# Altium PCB Route_Guide_and_Tuning.PcbDoc (part 2 of 8)
Units mil, origin at the board's own origin, x right, y up, seen from the top; angles counter-clockwise.
Board outline 3600 x 2300 mil, 14 copper layers (L1 TOP, L2_G, L3 SIG, L4_G, L4 SIG, L6_P, L7_G, L10_P, L11_P, L7 SIG, L13_P, L8 SIG, L15_G, L10 BOT), stack 89.291 mil thick; 4 components, 1934 nets, 2174 pads, 2165 vias.
Unrouted connection lines stored in the file: 123.
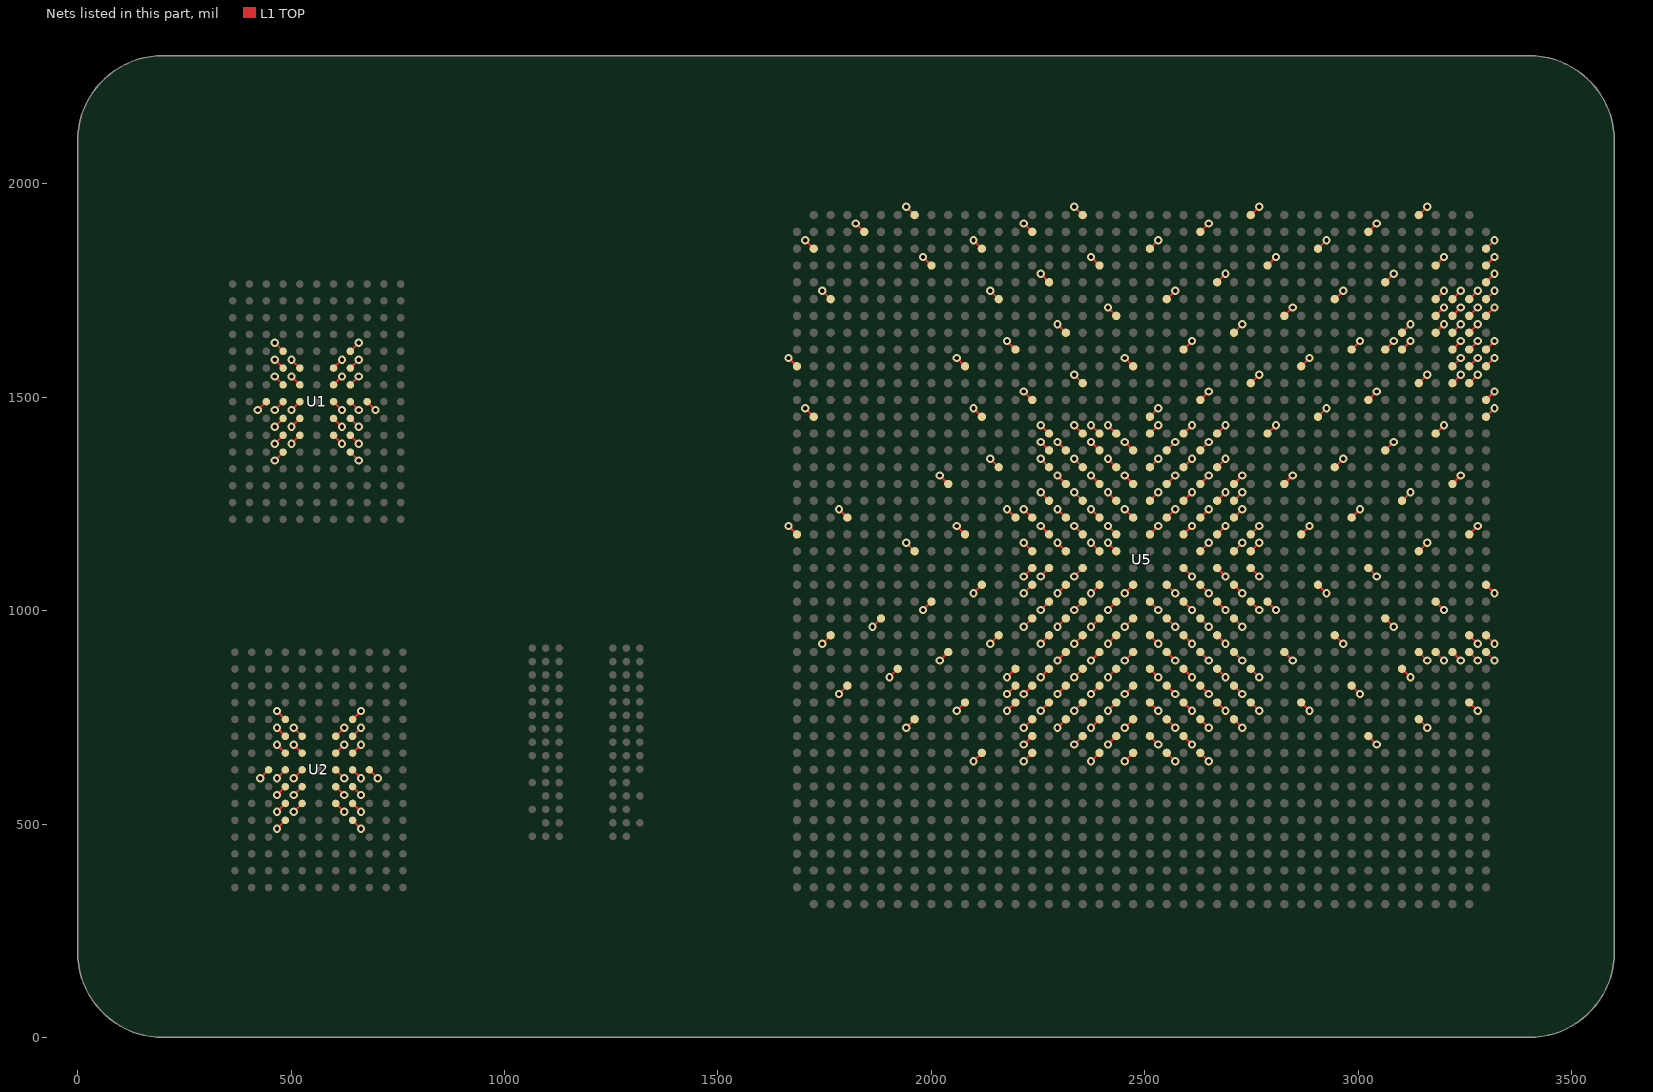
[diagram p14: the nets of this part, all layers, seen from the top]

## Footprints (in the part's own frame and the unit in brackets; to place one, negate y for a bottom-side part, rotate by r counter-clockwise, add the part's x,y. Pads: shape width x height; smd on the part's side, far side on the other; paste and mask are expansions set on the pad) (continued)
FFG1759 [mm] "BGA, 1760-Leads, Body 42.5x42.5mm, Pitch 1mm"
  round 0.5 smd: A2(-19.5,20.5) A3(-18.5,20.5) A4(-17.5,20.5) A5(-16.5,20.5) A6(-15.5,20.5) A7(-14.5,20.5) A8(-13.5,20.5) A9(-12.5,20.5) A10(-11.5,20.5) A11(-10.5,20.5) A12(-9.5,20.5) A13(-8.5,20.5) A14(-7.5,20.5) A15(-6.5,20.5) A16(-5.5,20.5) A17(-4.5,20.5) A18(-3.5,20.5) A19(-2.5,20.5) A20(-1.5,20.5) A21(-0.5,20.5) A22(0.5,20.5) A23(1.5,20.5) A24(2.5,20.5) A25(3.5,20.5) A26(4.5,20.5) A27(5.5,20.5) A28(6.5,20.5) A29(7.5,20.5) A30(8.5,20.5) A31(9.5,20.5) A32(10.5,20.5) A33(11.5,20.5) A34(12.5,20.5) A35(13.5,20.5) A36(14.5,20.5) A37(15.5,20.5) A38(16.5,20.5) A39(17.5,20.5) A40(18.5,20.5) A41(19.5,20.5) AA1(-20.5,0.5) AA2(-19.5,0.5) AA3(-18.5,0.5) AA4(-17.5,0.5) AA5(-16.5,0.5) AA6(-15.5,0.5) AA7(-14.5,0.5) AA8(-13.5,0.5) AA9(-12.5,0.5) AA10(-11.5,0.5) AA11(-10.5,0.5) AA12(-9.5,0.5) AA13(-8.5,0.5) AA14(-7.5,0.5) AA15(-6.5,0.5) AA16(-5.5,0.5) AA17(-4.5,0.5) AA18(-3.5,0.5) AA19(-2.5,0.5) AA20(-1.5,0.5) AA21(-0.5,0.5) AA22(0.5,0.5) AA23(1.5,0.5) AA24(2.5,0.5) AA25(3.5,0.5) AA26(4.5,0.5) AA27(5.5,0.5) AA28(6.5,0.5) AA29(7.5,0.5) AA30(8.5,0.5) AA31(9.5,0.5) AA32(10.5,0.5) AA33(11.5,0.5) AA34(12.5,0.5) AA35(13.5,0.5) AA36(14.5,0.5) AA37(15.5,0.5) AA38(16.5,0.5) AA39(17.5,0.5) AA40(18.5,0.5) AA41(19.5,0.5) AA42(20.5,0.5) AB1(-20.5,-0.5) AB2(-19.5,-0.5) AB3(-18.5,-0.5) AB4(-17.5,-0.5) AB5(-16.5,-0.5) AB6(-15.5,-0.5) AB7(-14.5,-0.5) AB8(-13.5,-0.5) AB9(-12.5,-0.5) AB10(-11.5,-0.5) AB11(-10.5,-0.5) AB12(-9.5,-0.5) AB13(-8.5,-0.5) AB14(-7.5,-0.5) AB15(-6.5,-0.5) AB16(-5.5,-0.5) AB17(-4.5,-0.5) AB18(-3.5,-0.5) AB19(-2.5,-0.5) AB20(-1.5,-0.5) AB21(-0.5,-0.5) AB22(0.5,-0.5) AB23(1.5,-0.5) AB24(2.5,-0.5) AB25(3.5,-0.5) AB26(4.5,-0.5) AB27(5.5,-0.5) AB28(6.5,-0.5) AB29(7.5,-0.5) AB30(8.5,-0.5) AB31(9.5,-0.5) AB32(10.5,-0.5) AB33(11.5,-0.5) AB34(12.5,-0.5) AB35(13.5,-0.5) AB36(14.5,-0.5) AB37(15.5,-0.5) AB38(16.5,-0.5) AB39(17.5,-0.5) AB40(18.5,-0.5) AB41(19.5,-0.5) AB42(20.5,-0.5) AC1(-20.5,-1.5) AC2(-19.5,-1.5) AC3(-18.5,-1.5) AC4(-17.5,-1.5) AC5(-16.5,-1.5) AC6(-15.5,-1.5) AC7(-14.5,-1.5) AC8(-13.5,-1.5) AC9(-12.5,-1.5) AC10(-11.5,-1.5) AC11(-10.5,-1.5) AC12(-9.5,-1.5) AC13(-8.5,-1.5) AC14(-7.5,-1.5) AC15(-6.5,-1.5) AC16(-5.5,-1.5) AC17(-4.5,-1.5) AC18(-3.5,-1.5) AC19(-2.5,-1.5) AC20(-1.5,-1.5) AC21(-0.5,-1.5) AC22(0.5,-1.5) AC23(1.5,-1.5) AC24(2.5,-1.5) AC25(3.5,-1.5) AC26(4.5,-1.5) AC27(5.5,-1.5) AC28(6.5,-1.5) AC29(7.5,-1.5) AC30(8.5,-1.5) AC31(9.5,-1.5) AC32(10.5,-1.5) AC33(11.5,-1.5) AC34(12.5,-1.5) AC35(13.5,-1.5) AC36(14.5,-1.5) AC37(15.5,-1.5) AC38(16.5,-1.5) AC39(17.5,-1.5) AC40(18.5,-1.5) AC41(19.5,-1.5) AC42(20.5,-1.5) AD1(-20.5,-2.5) AD2(-19.5,-2.5) AD3(-18.5,-2.5) AD4(-17.5,-2.5) AD5(-16.5,-2.5) AD6(-15.5,-2.5) AD7(-14.5,-2.5) AD8(-13.5,-2.5) AD9(-12.5,-2.5) AD10(-11.5,-2.5) AD11(-10.5,-2.5) AD12(-9.5,-2.5) AD13(-8.5,-2.5) AD14(-7.5,-2.5) AD15(-6.5,-2.5) AD16(-5.5,-2.5) AD17(-4.5,-2.5) AD18(-3.5,-2.5) AD19(-2.5,-2.5) AD20(-1.5,-2.5) AD21(-0.5,-2.5) AD22(0.5,-2.5) AD23(1.5,-2.5) AD24(2.5,-2.5) AD25(3.5,-2.5) AD26(4.5,-2.5) AD27(5.5,-2.5) AD28(6.5,-2.5) AD29(7.5,-2.5) AD30(8.5,-2.5) AD31(9.5,-2.5) AD32(10.5,-2.5) AD33(11.5,-2.5) AD34(12.5,-2.5) AD35(13.5,-2.5) AD36(14.5,-2.5) AD37(15.5,-2.5) AD38(16.5,-2.5) AD39(17.5,-2.5) AD40(18.5,-2.5) AD41(19.5,-2.5) AD42(20.5,-2.5) AE1(-20.5,-3.5) AE2(-19.5,-3.5) AE3(-18.5,-3.5) AE4(-17.5,-3.5) AE5(-16.5,-3.5) AE6(-15.5,-3.5) AE7(-14.5,-3.5) AE8(-13.5,-3.5) AE9(-12.5,-3.5) AE10(-11.5,-3.5) AE11(-10.5,-3.5) AE12(-9.5,-3.5) AE13(-8.5,-3.5) AE14(-7.5,-3.5) AE15(-6.5,-3.5) AE16(-5.5,-3.5) AE17(-4.5,-3.5) AE18(-3.5,-3.5) AE19(-2.5,-3.5) AE20(-1.5,-3.5) AE21(-0.5,-3.5) AE22(0.5,-3.5) AE23(1.5,-3.5) AE24(2.5,-3.5) AE25(3.5,-3.5) AE26(4.5,-3.5) AE27(5.5,-3.5) AE28(6.5,-3.5) AE29(7.5,-3.5) AE30(8.5,-3.5) AE31(9.5,-3.5) AE32(10.5,-3.5) AE33(11.5,-3.5) AE34(12.5,-3.5) AE35(13.5,-3.5) AE36(14.5,-3.5) AE37(15.5,-3.5) AE38(16.5,-3.5) AE39(17.5,-3.5) AE40(18.5,-3.5) AE41(19.5,-3.5) AE42(20.5,-3.5) AF1(-20.5,-4.5) AF2(-19.5,-4.5) AF3(-18.5,-4.5) AF4(-17.5,-4.5) AF5(-16.5,-4.5) AF6(-15.5,-4.5) AF7(-14.5,-4.5) AF8(-13.5,-4.5) AF9(-12.5,-4.5) AF10(-11.5,-4.5) AF11(-10.5,-4.5) AF12(-9.5,-4.5) AF13(-8.5,-4.5) AF14(-7.5,-4.5) AF15(-6.5,-4.5) AF16(-5.5,-4.5) AF17(-4.5,-4.5) AF18(-3.5,-4.5) AF19(-2.5,-4.5) AF20(-1.5,-4.5) AF21(-0.5,-4.5) AF22(0.5,-4.5) AF23(1.5,-4.5) AF24(2.5,-4.5) AF25(3.5,-4.5) AF26(4.5,-4.5) AF27(5.5,-4.5) AF28(6.5,-4.5) AF29(7.5,-4.5) AF30(8.5,-4.5) AF31(9.5,-4.5) AF32(10.5,-4.5) AF33(11.5,-4.5) AF34(12.5,-4.5) AF35(13.5,-4.5) AF36(14.5,-4.5) AF37(15.5,-4.5) AF38(16.5,-4.5) AF39(17.5,-4.5) AF40(18.5,-4.5) AF41(19.5,-4.5) AF42(20.5,-4.5) AG1(-20.5,-5.5) AG2(-19.5,-5.5) AG3(-18.5,-5.5) AG4(-17.5,-5.5) AG5(-16.5,-5.5) AG6(-15.5,-5.5) AG7(-14.5,-5.5) AG8(-13.5,-5.5) AG9(-12.5,-5.5) AG10(-11.5,-5.5) AG11(-10.5,-5.5) AG12(-9.5,-5.5) AG13(-8.5,-5.5) AG14(-7.5,-5.5) AG15(-6.5,-5.5) AG16(-5.5,-5.5) AG17(-4.5,-5.5) AG18(-3.5,-5.5) AG19(-2.5,-5.5) AG20(-1.5,-5.5) AG21(-0.5,-5.5) AG22(0.5,-5.5) AG23(1.5,-5.5) AG24(2.5,-5.5) AG25(3.5,-5.5) AG26(4.5,-5.5) AG27(5.5,-5.5) AG28(6.5,-5.5) AG29(7.5,-5.5) AG30(8.5,-5.5) AG31(9.5,-5.5) AG32(10.5,-5.5) AG33(11.5,-5.5) AG34(12.5,-5.5) AG35(13.5,-5.5) AG36(14.5,-5.5) AG37(15.5,-5.5) AG38(16.5,-5.5) AG39(17.5,-5.5) AG40(18.5,-5.5) AG41(19.5,-5.5) AG42(20.5,-5.5) AH1(-20.5,-6.5) AH2(-19.5,-6.5) AH3(-18.5,-6.5) AH4(-17.5,-6.5) AH5(-16.5,-6.5) AH6(-15.5,-6.5) AH7(-14.5,-6.5) AH8(-13.5,-6.5) AH9(-12.5,-6.5) AH10(-11.5,-6.5) AH11(-10.5,-6.5) AH12(-9.5,-6.5) AH13(-8.5,-6.5) AH14(-7.5,-6.5) AH15(-6.5,-6.5) AH16(-5.5,-6.5) AH17(-4.5,-6.5) AH18(-3.5,-6.5) AH19(-2.5,-6.5) AH20(-1.5,-6.5) AH21(-0.5,-6.5) AH22(0.5,-6.5) AH23(1.5,-6.5) AH24(2.5,-6.5) AH25(3.5,-6.5) AH26(4.5,-6.5) AH27(5.5,-6.5) AH28(6.5,-6.5) AH29(7.5,-6.5) AH30(8.5,-6.5) AH31(9.5,-6.5) AH32(10.5,-6.5) AH33(11.5,-6.5) AH34(12.5,-6.5) AH35(13.5,-6.5) AH36(14.5,-6.5) AH37(15.5,-6.5) AH38(16.5,-6.5) AH39(17.5,-6.5) AH40(18.5,-6.5) AH41(19.5,-6.5) AH42(20.5,-6.5) AJ1(-20.5,-7.5) AJ2(-19.5,-7.5) AJ3(-18.5,-7.5) AJ4(-17.5,-7.5) AJ5(-16.5,-7.5) AJ6(-15.5,-7.5) AJ7(-14.5,-7.5) AJ8(-13.5,-7.5) AJ9(-12.5,-7.5) AJ10(-11.5,-7.5) AJ11(-10.5,-7.5) AJ12(-9.5,-7.5) AJ13(-8.5,-7.5) AJ14(-7.5,-7.5) AJ15(-6.5,-7.5) AJ16(-5.5,-7.5) AJ17(-4.5,-7.5) AJ18(-3.5,-7.5) AJ19(-2.5,-7.5) AJ20(-1.5,-7.5) AJ21(-0.5,-7.5) AJ22(0.5,-7.5) AJ23(1.5,-7.5) AJ24(2.5,-7.5) AJ25(3.5,-7.5) AJ26(4.5,-7.5) AJ27(5.5,-7.5) AJ28(6.5,-7.5) AJ29(7.5,-7.5) AJ30(8.5,-7.5) AJ31(9.5,-7.5) AJ32(10.5,-7.5) AJ33(11.5,-7.5) AJ34(12.5,-7.5) AJ35(13.5,-7.5) AJ36(14.5,-7.5) AJ37(15.5,-7.5) AJ38(16.5,-7.5) AJ39(17.5,-7.5) AJ40(18.5,-7.5) AJ41(19.5,-7.5) AJ42(20.5,-7.5) AK1(-20.5,-8.5) AK2(-19.5,-8.5) AK3(-18.5,-8.5) AK4(-17.5,-8.5) AK5(-16.5,-8.5) AK6(-15.5,-8.5) AK7(-14.5,-8.5) AK8(-13.5,-8.5) AK9(-12.5,-8.5) AK10(-11.5,-8.5) AK11(-10.5,-8.5) AK12(-9.5,-8.5) AK13(-8.5,-8.5) AK14(-7.5,-8.5) AK15(-6.5,-8.5) AK16(-5.5,-8.5) AK17(-4.5,-8.5) AK18(-3.5,-8.5) AK19(-2.5,-8.5) AK20(-1.5,-8.5) AK21(-0.5,-8.5) AK22(0.5,-8.5) AK23(1.5,-8.5) AK24(2.5,-8.5) AK25(3.5,-8.5) AK26(4.5,-8.5) AK27(5.5,-8.5) AK28(6.5,-8.5) AK29(7.5,-8.5) AK30(8.5,-8.5) AK31(9.5,-8.5) AK32(10.5,-8.5) AK33(11.5,-8.5) AK34(12.5,-8.5) AK35(13.5,-8.5) AK36(14.5,-8.5) AK37(15.5,-8.5) AK38(16.5,-8.5) AK39(17.5,-8.5) AK40(18.5,-8.5) AK41(19.5,-8.5) AK42(20.5,-8.5) AL1(-20.5,-9.5) AL2(-19.5,-9.5) AL3(-18.5,-9.5) AL4(-17.5,-9.5) AL5(-16.5,-9.5) AL6(-15.5,-9.5) AL7(-14.5,-9.5) AL8(-13.5,-9.5) AL9(-12.5,-9.5) AL10(-11.5,-9.5) AL11(-10.5,-9.5) AL12(-9.5,-9.5) AL13(-8.5,-9.5) AL14(-7.5,-9.5) AL15(-6.5,-9.5) AL16(-5.5,-9.5) AL17(-4.5,-9.5) AL18(-3.5,-9.5) AL19(-2.5,-9.5) AL20(-1.5,-9.5) AL21(-0.5,-9.5) AL22(0.5,-9.5) AL23(1.5,-9.5) AL24(2.5,-9.5) AL25(3.5,-9.5) AL26(4.5,-9.5) AL27(5.5,-9.5) AL28(6.5,-9.5) AL29(7.5,-9.5) AL30(8.5,-9.5) AL31(9.5,-9.5) AL32(10.5,-9.5) AL33(11.5,-9.5) AL34(12.5,-9.5) AL35(13.5,-9.5) AL36(14.5,-9.5) AL37(15.5,-9.5) AL38(16.5,-9.5) AL39(17.5,-9.5) AL40(18.5,-9.5) AL41(19.5,-9.5) AL42(20.5,-9.5) AM1(-20.5,-10.5) AM2(-19.5,-10.5) AM3(-18.5,-10.5) AM4(-17.5,-10.5) AM5(-16.5,-10.5) AM6(-15.5,-10.5) AM7(-14.5,-10.5) AM8(-13.5,-10.5) AM9(-12.5,-10.5) AM10(-11.5,-10.5) AM11(-10.5,-10.5) AM12(-9.5,-10.5) AM13(-8.5,-10.5) AM14(-7.5,-10.5) AM15(-6.5,-10.5) AM16(-5.5,-10.5) AM17(-4.5,-10.5) AM18(-3.5,-10.5) AM19(-2.5,-10.5) AM20(-1.5,-10.5) AM21(-0.5,-10.5) AM22(0.5,-10.5) AM23(1.5,-10.5) AM24(2.5,-10.5) AM25(3.5,-10.5) AM26(4.5,-10.5) AM27(5.5,-10.5) AM28(6.5,-10.5) AM29(7.5,-10.5) AM30(8.5,-10.5) AM31(9.5,-10.5) AM32(10.5,-10.5) AM33(11.5,-10.5) AM34(12.5,-10.5) AM35(13.5,-10.5) AM36(14.5,-10.5) AM37(15.5,-10.5) AM38(16.5,-10.5) AM39(17.5,-10.5) AM40(18.5,-10.5) AM41(19.5,-10.5) AM42(20.5,-10.5) AN1(-20.5,-11.5) AN2(-19.5,-11.5) AN3(-18.5,-11.5) AN4(-17.5,-11.5) AN5(-16.5,-11.5) AN6(-15.5,-11.5) AN7(-14.5,-11.5) AN8(-13.5,-11.5) AN9(-12.5,-11.5) AN10(-11.5,-11.5) AN11(-10.5,-11.5) AN12(-9.5,-11.5) AN13(-8.5,-11.5) AN14(-7.5,-11.5) AN15(-6.5,-11.5) AN16(-5.5,-11.5) AN17(-4.5,-11.5) AN18(-3.5,-11.5) AN19(-2.5,-11.5) AN20(-1.5,-11.5) AN21(-0.5,-11.5) AN22(0.5,-11.5) AN23(1.5,-11.5) AN24(2.5,-11.5) AN25(3.5,-11.5) AN26(4.5,-11.5) AN27(5.5,-11.5) AN28(6.5,-11.5) AN29(7.5,-11.5) AN30(8.5,-11.5) AN31(9.5,-11.5) AN32(10.5,-11.5) AN33(11.5,-11.5) AN34(12.5,-11.5) AN35(13.5,-11.5) AN36(14.5,-11.5) AN37(15.5,-11.5) AN38(16.5,-11.5) AN39(17.5,-11.5) AN40(18.5,-11.5) AN41(19.5,-11.5) AN42(20.5,-11.5) AP1(-20.5,-12.5) AP2(-19.5,-12.5) AP3(-18.5,-12.5) AP4(-17.5,-12.5) AP5(-16.5,-12.5) AP6(-15.5,-12.5) AP7(-14.5,-12.5) AP8(-13.5,-12.5) AP9(-12.5,-12.5) AP10(-11.5,-12.5) AP11(-10.5,-12.5) AP12(-9.5,-12.5) AP13(-8.5,-12.5) AP14(-7.5,-12.5) AP15(-6.5,-12.5) AP16(-5.5,-12.5) AP17(-4.5,-12.5) AP18(-3.5,-12.5) AP19(-2.5,-12.5) AP20(-1.5,-12.5) AP21(-0.5,-12.5) AP22(0.5,-12.5) AP23(1.5,-12.5) AP24(2.5,-12.5) AP25(3.5,-12.5) AP26(4.5,-12.5) AP27(5.5,-12.5) AP28(6.5,-12.5) AP29(7.5,-12.5) AP30(8.5,-12.5) AP31(9.5,-12.5) AP32(10.5,-12.5) AP33(11.5,-12.5) AP34(12.5,-12.5) AP35(13.5,-12.5) AP36(14.5,-12.5) AP37(15.5,-12.5) AP38(16.5,-12.5) AP39(17.5,-12.5) AP40(18.5,-12.5) AP41(19.5,-12.5) AP42(20.5,-12.5) AR1(-20.5,-13.5) AR2(-19.5,-13.5) AR3(-18.5,-13.5) AR4(-17.5,-13.5) AR5(-16.5,-13.5) AR6(-15.5,-13.5) AR7(-14.5,-13.5) AR8(-13.5,-13.5) AR9(-12.5,-13.5) AR10(-11.5,-13.5) AR11(-10.5,-13.5) AR12(-9.5,-13.5) AR13(-8.5,-13.5) AR14(-7.5,-13.5) AR15(-6.5,-13.5) AR16(-5.5,-13.5) AR17(-4.5,-13.5) AR18(-3.5,-13.5) AR19(-2.5,-13.5) AR20(-1.5,-13.5) AR21(-0.5,-13.5) AR22(0.5,-13.5) AR23(1.5,-13.5) AR24(2.5,-13.5) AR25(3.5,-13.5) AR26(4.5,-13.5) AR27(5.5,-13.5) AR28(6.5,-13.5) AR29(7.5,-13.5) AR30(8.5,-13.5) AR31(9.5,-13.5) AR32(10.5,-13.5) AR33(11.5,-13.5) AR34(12.5,-13.5) AR35(13.5,-13.5) AR36(14.5,-13.5) AR37(15.5,-13.5) AR38(16.5,-13.5) AR39(17.5,-13.5) AR40(18.5,-13.5) AR41(19.5,-13.5) AR42(20.5,-13.5) AT1(-20.5,-14.5) AT2(-19.5,-14.5) AT3(-18.5,-14.5) AT4(-17.5,-14.5) AT5(-16.5,-14.5) AT6(-15.5,-14.5) AT7(-14.5,-14.5) AT8(-13.5,-14.5) AT9(-12.5,-14.5) AT10(-11.5,-14.5) AT11(-10.5,-14.5) AT12(-9.5,-14.5) AT13(-8.5,-14.5) AT14(-7.5,-14.5) AT15(-6.5,-14.5) AT16(-5.5,-14.5) AT17(-4.5,-14.5) AT18(-3.5,-14.5) AT19(-2.5,-14.5) AT20(-1.5,-14.5) AT21(-0.5,-14.5) AT22(0.5,-14.5) AT23(1.5,-14.5) AT24(2.5,-14.5) AT25(3.5,-14.5) AT26(4.5,-14.5) AT27(5.5,-14.5) AT28(6.5,-14.5) AT29(7.5,-14.5) AT30(8.5,-14.5) AT31(9.5,-14.5) AT32(10.5,-14.5) AT33(11.5,-14.5) AT34(12.5,-14.5) AT35(13.5,-14.5) AT36(14.5,-14.5) AT37(15.5,-14.5) AT38(16.5,-14.5) AT39(17.5,-14.5) AT40(18.5,-14.5) AT41(19.5,-14.5) AT42(20.5,-14.5) AU1(-20.5,-15.5) AU2(-19.5,-15.5) AU3(-18.5,-15.5) AU4(-17.5,-15.5) AU5(-16.5,-15.5) AU6(-15.5,-15.5) AU7(-14.5,-15.5) AU8(-13.5,-15.5) AU9(-12.5,-15.5) AU10(-11.5,-15.5) AU11(-10.5,-15.5) AU12(-9.5,-15.5) AU13(-8.5,-15.5) AU14(-7.5,-15.5) AU15(-6.5,-15.5) AU16(-5.5,-15.5) AU17(-4.5,-15.5) AU18(-3.5,-15.5) AU19(-2.5,-15.5) AU20(-1.5,-15.5) AU21(-0.5,-15.5) AU22(0.5,-15.5) AU23(1.5,-15.5) AU24(2.5,-15.5) AU25(3.5,-15.5) AU26(4.5,-15.5) AU27(5.5,-15.5) AU28(6.5,-15.5) AU29(7.5,-15.5) AU30(8.5,-15.5) AU31(9.5,-15.5) AU32(10.5,-15.5) AU33(11.5,-15.5) AU34(12.5,-15.5) AU35(13.5,-15.5) AU36(14.5,-15.5) AU37(15.5,-15.5) AU38(16.5,-15.5) AU39(17.5,-15.5) AU40(18.5,-15.5) AU41(19.5,-15.5) AU42(20.5,-15.5) AV1(-20.5,-16.5) AV2(-19.5,-16.5) AV3(-18.5,-16.5) AV4(-17.5,-16.5) AV5(-16.5,-16.5) AV6(-15.5,-16.5) AV7(-14.5,-16.5) AV8(-13.5,-16.5) AV9(-12.5,-16.5) AV10(-11.5,-16.5) AV11(-10.5,-16.5) AV12(-9.5,-16.5) AV13(-8.5,-16.5) AV14(-7.5,-16.5) AV15(-6.5,-16.5) AV16(-5.5,-16.5) AV17(-4.5,-16.5) AV18(-3.5,-16.5) AV19(-2.5,-16.5) AV20(-1.5,-16.5) AV21(-0.5,-16.5) AV22(0.5,-16.5) AV23(1.5,-16.5) AV24(2.5,-16.5) AV25(3.5,-16.5) AV26(4.5,-16.5) AV27(5.5,-16.5) AV28(6.5,-16.5) AV29(7.5,-16.5) AV30(8.5,-16.5) AV31(9.5,-16.5) AV32(10.5,-16.5) AV33(11.5,-16.5) AV34(12.5,-16.5) AV35(13.5,-16.5) AV36(14.5,-16.5) AV37(15.5,-16.5) AV38(16.5,-16.5) AV39(17.5,-16.5) AV40(18.5,-16.5) AV41(19.5,-16.5) AV42(20.5,-16.5) AW1(-20.5,-17.5) AW2(-19.5,-17.5) AW3(-18.5,-17.5) AW4(-17.5,-17.5) AW5(-16.5,-17.5) AW6(-15.5,-17.5) AW7(-14.5,-17.5) AW8(-13.5,-17.5) AW9(-12.5,-17.5) AW10(-11.5,-17.5) AW11(-10.5,-17.5) AW12(-9.5,-17.5) AW13(-8.5,-17.5) AW14(-7.5,-17.5) AW15(-6.5,-17.5) AW16(-5.5,-17.5) AW17(-4.5,-17.5) AW18(-3.5,-17.5) AW19(-2.5,-17.5) AW20(-1.5,-17.5) AW21(-0.5,-17.5) AW22(0.5,-17.5) AW23(1.5,-17.5) AW24(2.5,-17.5) AW25(3.5,-17.5) AW26(4.5,-17.5) AW27(5.5,-17.5) AW28(6.5,-17.5) AW29(7.5,-17.5) AW30(8.5,-17.5) AW31(9.5,-17.5) AW32(10.5,-17.5) AW33(11.5,-17.5) AW34(12.5,-17.5) AW35(13.5,-17.5) AW36(14.5,-17.5) AW37(15.5,-17.5) AW38(16.5,-17.5) AW39(17.5,-17.5) AW40(18.5,-17.5) AW41(19.5,-17.5) AW42(20.5,-17.5) AY1(-20.5,-18.5) AY2(-19.5,-18.5) AY3(-18.5,-18.5) AY4(-17.5,-18.5) AY5(-16.5,-18.5) AY6(-15.5,-18.5) AY7(-14.5,-18.5) AY8(-13.5,-18.5) AY9(-12.5,-18.5) AY10(-11.5,-18.5) AY11(-10.5,-18.5) AY12(-9.5,-18.5) AY13(-8.5,-18.5) AY14(-7.5,-18.5) AY15(-6.5,-18.5) AY16(-5.5,-18.5) AY17(-4.5,-18.5) AY18(-3.5,-18.5) AY19(-2.5,-18.5) AY20(-1.5,-18.5) AY21(-0.5,-18.5) AY22(0.5,-18.5) AY23(1.5,-18.5) AY24(2.5,-18.5) AY25(3.5,-18.5) AY26(4.5,-18.5) AY27(5.5,-18.5) AY28(6.5,-18.5) AY29(7.5,-18.5) AY30(8.5,-18.5) AY31(9.5,-18.5) AY32(10.5,-18.5) AY33(11.5,-18.5) AY34(12.5,-18.5) AY35(13.5,-18.5) AY36(14.5,-18.5) AY37(15.5,-18.5) AY38(16.5,-18.5) AY39(17.5,-18.5) AY40(18.5,-18.5) AY41(19.5,-18.5) AY42(20.5,-18.5) B1(-20.5,19.5) B2(-19.5,19.5) B3(-18.5,19.5) B4(-17.5,19.5) B5(-16.5,19.5) B6(-15.5,19.5) B7(-14.5,19.5) B8(-13.5,19.5) B9(-12.5,19.5) B10(-11.5,19.5) B11(-10.5,19.5) B12(-9.5,19.5) B13(-8.5,19.5) B14(-7.5,19.5) B15(-6.5,19.5) B16(-5.5,19.5) B17(-4.5,19.5) B18(-3.5,19.5) B19(-2.5,19.5) B20(-1.5,19.5) B21(-0.5,19.5) B22(0.5,19.5) B23(1.5,19.5) B24(2.5,19.5) B25(3.5,19.5) B26(4.5,19.5) B27(5.5,19.5) B28(6.5,19.5) B29(7.5,19.5) B30(8.5,19.5) B31(9.5,19.5) B32(10.5,19.5) B33(11.5,19.5) B34(12.5,19.5) B35(13.5,19.5) B36(14.5,19.5) B37(15.5,19.5) B38(16.5,19.5) B39(17.5,19.5) B40(18.5,19.5) B41(19.5,19.5) B42(20.5,19.5) BA1(-20.5,-19.5) BA2(-19.5,-19.5) BA3(-18.5,-19.5) BA4(-17.5,-19.5) BA5(-16.5,-19.5) BA6(-15.5,-19.5) BA7(-14.5,-19.5) BA8(-13.5,-19.5) BA9(-12.5,-19.5) BA10(-11.5,-19.5) BA11(-10.5,-19.5) BA12(-9.5,-19.5) BA13(-8.5,-19.5) BA14(-7.5,-19.5) BA15(-6.5,-19.5) BA16(-5.5,-19.5) BA17(-4.5,-19.5) BA18(-3.5,-19.5) BA19(-2.5,-19.5) BA20(-1.5,-19.5) BA21(-0.5,-19.5) BA22(0.5,-19.5) BA23(1.5,-19.5) BA24(2.5,-19.5) BA25(3.5,-19.5) BA26(4.5,-19.5) BA27(5.5,-19.5) BA28(6.5,-19.5) BA29(7.5,-19.5) BA30(8.5,-19.5) BA31(9.5,-19.5) BA32(10.5,-19.5) BA33(11.5,-19.5) BA34(12.5,-19.5) BA35(13.5,-19.5) BA36(14.5,-19.5) BA37(15.5,-19.5) BA38(16.5,-19.5) BA39(17.5,-19.5) BA40(18.5,-19.5) BA41(19.5,-19.5) BA42(20.5,-19.5) BB2(-19.5,-20.5) BB3(-18.5,-20.5) BB4(-17.5,-20.5) BB5(-16.5,-20.5) BB6(-15.5,-20.5) BB7(-14.5,-20.5) BB8(-13.5,-20.5) BB9(-12.5,-20.5) BB10(-11.5,-20.5) BB11(-10.5,-20.5) BB12(-9.5,-20.5) BB13(-8.5,-20.5) BB14(-7.5,-20.5) BB15(-6.5,-20.5) BB16(-5.5,-20.5) BB17(-4.5,-20.5) BB18(-3.5,-20.5) BB19(-2.5,-20.5) BB20(-1.5,-20.5) BB21(-0.5,-20.5) BB22(0.5,-20.5) BB23(1.5,-20.5) BB24(2.5,-20.5) BB25(3.5,-20.5) BB26(4.5,-20.5) BB27(5.5,-20.5) BB28(6.5,-20.5) BB29(7.5,-20.5) BB30(8.5,-20.5) BB31(9.5,-20.5) BB32(10.5,-20.5) BB33(11.5,-20.5) BB34(12.5,-20.5) BB35(13.5,-20.5) BB36(14.5,-20.5) BB37(15.5,-20.5) BB38(16.5,-20.5) BB39(17.5,-20.5) BB40(18.5,-20.5) BB41(19.5,-20.5) C1(-20.5,18.5) C2(-19.5,18.5) C3(-18.5,18.5) C4(-17.5,18.5) C5(-16.5,18.5) C6(-15.5,18.5) C7(-14.5,18.5) C8(-13.5,18.5) C9(-12.5,18.5) C10(-11.5,18.5) C11(-10.5,18.5) C12(-9.5,18.5) C13(-8.5,18.5) C14(-7.5,18.5) C15(-6.5,18.5) C16(-5.5,18.5) C17(-4.5,18.5) C18(-3.5,18.5) C19(-2.5,18.5) C20(-1.5,18.5) C21(-0.5,18.5) C22(0.5,18.5) C23(1.5,18.5) C24(2.5,18.5) C25(3.5,18.5) C26(4.5,18.5) C27(5.5,18.5) C28(6.5,18.5) C29(7.5,18.5) C30(8.5,18.5) C31(9.5,18.5) C32(10.5,18.5) C33(11.5,18.5) C34(12.5,18.5) C35(13.5,18.5) C36(14.5,18.5) C37(15.5,18.5) C38(16.5,18.5) C39(17.5,18.5) C40(18.5,18.5) C41(19.5,18.5) C42(20.5,18.5) D1(-20.5,17.5) D2(-19.5,17.5) D3(-18.5,17.5) D4(-17.5,17.5) D5(-16.5,17.5) D6(-15.5,17.5) D7(-14.5,17.5) D8(-13.5,17.5) D9(-12.5,17.5) D10(-11.5,17.5) D11(-10.5,17.5) D12(-9.5,17.5) D13(-8.5,17.5) D14(-7.5,17.5) D15(-6.5,17.5) D16(-5.5,17.5) D17(-4.5,17.5) D18(-3.5,17.5) D19(-2.5,17.5) D20(-1.5,17.5) D21(-0.5,17.5) D22(0.5,17.5) D23(1.5,17.5) D24(2.5,17.5) D25(3.5,17.5) D26(4.5,17.5) D27(5.5,17.5) D28(6.5,17.5) D29(7.5,17.5) D30(8.5,17.5) D31(9.5,17.5) D32(10.5,17.5) D33(11.5,17.5) D34(12.5,17.5) D35(13.5,17.5) D36(14.5,17.5) D37(15.5,17.5) D38(16.5,17.5) D39(17.5,17.5) D40(18.5,17.5) D41(19.5,17.5) D42(20.5,17.5) E1(-20.5,16.5) E2(-19.5,16.5) E3(-18.5,16.5) E4(-17.5,16.5) E5(-16.5,16.5) E6(-15.5,16.5) E7(-14.5,16.5) E8(-13.5,16.5) E9(-12.5,16.5) E10(-11.5,16.5) E11(-10.5,16.5) E12(-9.5,16.5) E13(-8.5,16.5) E14(-7.5,16.5) E15(-6.5,16.5) E16(-5.5,16.5) E17(-4.5,16.5) E18(-3.5,16.5) E19(-2.5,16.5) E20(-1.5,16.5) E21(-0.5,16.5) E22(0.5,16.5) E23(1.5,16.5) E24(2.5,16.5) E25(3.5,16.5) E26(4.5,16.5) E27(5.5,16.5) E28(6.5,16.5) E29(7.5,16.5) E30(8.5,16.5) E31(9.5,16.5) E32(10.5,16.5) E33(11.5,16.5) E34(12.5,16.5) E35(13.5,16.5) E36(14.5,16.5) E37(15.5,16.5) E38(16.5,16.5) E39(17.5,16.5) E40(18.5,16.5) E41(19.5,16.5) E42(20.5,16.5) F1(-20.5,15.5) F2(-19.5,15.5) F3(-18.5,15.5) F4(-17.5,15.5) F5(-16.5,15.5) F6(-15.5,15.5) F7(-14.5,15.5) F8(-13.5,15.5) F9(-12.5,15.5) F10(-11.5,15.5) F11(-10.5,15.5) F12(-9.5,15.5) F13(-8.5,15.5) F14(-7.5,15.5) F15(-6.5,15.5) F16(-5.5,15.5) F17(-4.5,15.5) F18(-3.5,15.5) F19(-2.5,15.5) F20(-1.5,15.5) F21(-0.5,15.5) F22(0.5,15.5) F23(1.5,15.5) F24(2.5,15.5) F25(3.5,15.5) F26(4.5,15.5) F27(5.5,15.5) F28(6.5,15.5) F29(7.5,15.5) F30(8.5,15.5) F31(9.5,15.5) F32(10.5,15.5) F33(11.5,15.5) F34(12.5,15.5) F35(13.5,15.5) F36(14.5,15.5) F37(15.5,15.5) F38(16.5,15.5) F39(17.5,15.5) F40(18.5,15.5) F41(19.5,15.5) F42(20.5,15.5) G1(-20.5,14.5) G2(-19.5,14.5) G3(-18.5,14.5) G4(-17.5,14.5) G5(-16.5,14.5) G6(-15.5,14.5) G7(-14.5,14.5) G8(-13.5,14.5) G9(-12.5,14.5) G10(-11.5,14.5) G11(-10.5,14.5) G12(-9.5,14.5) G13(-8.5,14.5) G14(-7.5,14.5) G15(-6.5,14.5) G16(-5.5,14.5) G17(-4.5,14.5) G18(-3.5,14.5) G19(-2.5,14.5) G20(-1.5,14.5) G21(-0.5,14.5) G22(0.5,14.5) G23(1.5,14.5) G24(2.5,14.5) G25(3.5,14.5) G26(4.5,14.5) G27(5.5,14.5) G28(6.5,14.5) G29(7.5,14.5) G30(8.5,14.5) G31(9.5,14.5) G32(10.5,14.5) G33(11.5,14.5) G34(12.5,14.5) G35(13.5,14.5) G36(14.5,14.5) G37(15.5,14.5) G38(16.5,14.5) G39(17.5,14.5) G40(18.5,14.5) G41(19.5,14.5) G42(20.5,14.5) H1(-20.5,13.5) H2(-19.5,13.5) H3(-18.5,13.5) H4(-17.5,13.5) H5(-16.5,13.5) H6(-15.5,13.5) H7(-14.5,13.5) H8(-13.5,13.5) H9(-12.5,13.5) H10(-11.5,13.5) H11(-10.5,13.5) H12(-9.5,13.5) H13(-8.5,13.5) H14(-7.5,13.5) H15(-6.5,13.5) H16(-5.5,13.5) H17(-4.5,13.5) H18(-3.5,13.5) H19(-2.5,13.5) H20(-1.5,13.5) H21(-0.5,13.5) H22(0.5,13.5) H23(1.5,13.5) H24(2.5,13.5) H25(3.5,13.5) H26(4.5,13.5) H27(5.5,13.5) H28(6.5,13.5) H29(7.5,13.5) H30(8.5,13.5) H31(9.5,13.5) H32(10.5,13.5) H33(11.5,13.5) H34(12.5,13.5) H35(13.5,13.5) H36(14.5,13.5) H37(15.5,13.5) H38(16.5,13.5) H39(17.5,13.5) H40(18.5,13.5) H41(19.5,13.5) H42(20.5,13.5) J1(-20.5,12.5) J2(-19.5,12.5) J3(-18.5,12.5) J4(-17.5,12.5) J5(-16.5,12.5) J6(-15.5,12.5) J7(-14.5,12.5) J8(-13.5,12.5) J9(-12.5,12.5) J10(-11.5,12.5) J11(-10.5,12.5) J12(-9.5,12.5) J13(-8.5,12.5) J14(-7.5,12.5) J15(-6.5,12.5) J16(-5.5,12.5) J17(-4.5,12.5) J18(-3.5,12.5) J19(-2.5,12.5) J20(-1.5,12.5) J21(-0.5,12.5) J22(0.5,12.5) J23(1.5,12.5) J24(2.5,12.5) J25(3.5,12.5) J26(4.5,12.5) J27(5.5,12.5) J28(6.5,12.5) J29(7.5,12.5) J30(8.5,12.5) J31(9.5,12.5) J32(10.5,12.5) J33(11.5,12.5) J34(12.5,12.5) J35(13.5,12.5) J36(14.5,12.5) J37(15.5,12.5) J38(16.5,12.5) J39(17.5,12.5) J40(18.5,12.5) J41(19.5,12.5) J42(20.5,12.5) K1(-20.5,11.5) K2(-19.5,11.5) K3(-18.5,11.5) K4(-17.5,11.5) K5(-16.5,11.5) K6(-15.5,11.5) K7(-14.5,11.5) K8(-13.5,11.5) K9(-12.5,11.5) K10(-11.5,11.5) K11(-10.5,11.5) K12(-9.5,11.5) K13(-8.5,11.5) K14(-7.5,11.5) K15(-6.5,11.5) K16(-5.5,11.5) K17(-4.5,11.5) K18(-3.5,11.5) K19(-2.5,11.5) K20(-1.5,11.5) K21(-0.5,11.5) K22(0.5,11.5) K23(1.5,11.5) K24(2.5,11.5) K25(3.5,11.5) K26(4.5,11.5) K27(5.5,11.5) K28(6.5,11.5) K29(7.5,11.5) K30(8.5,11.5) K31(9.5,11.5) K32(10.5,11.5) K33(11.5,11.5) K34(12.5,11.5) K35(13.5,11.5) K36(14.5,11.5) K37(15.5,11.5) K38(16.5,11.5) K39(17.5,11.5) K40(18.5,11.5) K41(19.5,11.5) K42(20.5,11.5) L1(-20.5,10.5) L2(-19.5,10.5) L3(-18.5,10.5) L4(-17.5,10.5) L5(-16.5,10.5) L6(-15.5,10.5) L7(-14.5,10.5) L8(-13.5,10.5) L9(-12.5,10.5) L10(-11.5,10.5) L11(-10.5,10.5) L12(-9.5,10.5) L13(-8.5,10.5) L14(-7.5,10.5) L15(-6.5,10.5) L16(-5.5,10.5) L17(-4.5,10.5) L18(-3.5,10.5) L19(-2.5,10.5) L20(-1.5,10.5) L21(-0.5,10.5) L22(0.5,10.5) L23(1.5,10.5) L24(2.5,10.5) L25(3.5,10.5) L26(4.5,10.5) L27(5.5,10.5) L28(6.5,10.5) L29(7.5,10.5) L30(8.5,10.5) L31(9.5,10.5) L32(10.5,10.5) L33(11.5,10.5) L34(12.5,10.5) L35(13.5,10.5) L36(14.5,10.5) L37(15.5,10.5) L38(16.5,10.5) L39(17.5,10.5) L40(18.5,10.5) L41(19.5,10.5) L42(20.5,10.5) M1(-20.5,9.5) M2(-19.5,9.5) M3(-18.5,9.5) M4(-17.5,9.5) M5(-16.5,9.5) M6(-15.5,9.5) M7(-14.5,9.5) M8(-13.5,9.5) M9(-12.5,9.5) M10(-11.5,9.5) M11(-10.5,9.5) M12(-9.5,9.5) M13(-8.5,9.5) M14(-7.5,9.5) M15(-6.5,9.5) M16(-5.5,9.5) M17(-4.5,9.5) M18(-3.5,9.5) M19(-2.5,9.5) M20(-1.5,9.5) M21(-0.5,9.5) M22(0.5,9.5) M23(1.5,9.5) M24(2.5,9.5) M25(3.5,9.5) M26(4.5,9.5) M27(5.5,9.5) M28(6.5,9.5) M29(7.5,9.5) M30(8.5,9.5) M31(9.5,9.5) M32(10.5,9.5) M33(11.5,9.5) M34(12.5,9.5) M35(13.5,9.5) M36(14.5,9.5) M37(15.5,9.5) M38(16.5,9.5) M39(17.5,9.5) M40(18.5,9.5) M41(19.5,9.5) M42(20.5,9.5) N1(-20.5,8.5) N2(-19.5,8.5) N3(-18.5,8.5) N4(-17.5,8.5) N5(-16.5,8.5) N6(-15.5,8.5) N7(-14.5,8.5) N8(-13.5,8.5) N9(-12.5,8.5) N10(-11.5,8.5) N11(-10.5,8.5) N12(-9.5,8.5) N13(-8.5,8.5) N14(-7.5,8.5) N15(-6.5,8.5) N16(-5.5,8.5) N17(-4.5,8.5) N18(-3.5,8.5) N19(-2.5,8.5) N20(-1.5,8.5) N21(-0.5,8.5) N22(0.5,8.5) N23(1.5,8.5) N24(2.5,8.5) N25(3.5,8.5) N26(4.5,8.5) N27(5.5,8.5) N28(6.5,8.5) N29(7.5,8.5) N30(8.5,8.5) N31(9.5,8.5) N32(10.5,8.5) N33(11.5,8.5) N34(12.5,8.5) N35(13.5,8.5) N36(14.5,8.5) N37(15.5,8.5) N38(16.5,8.5) N39(17.5,8.5) N40(18.5,8.5) N41(19.5,8.5) N42(20.5,8.5) P1(-20.5,7.5) P2(-19.5,7.5) P3(-18.5,7.5) P4(-17.5,7.5) P5(-16.5,7.5) P6(-15.5,7.5) P7(-14.5,7.5) P8(-13.5,7.5) P9(-12.5,7.5) P10(-11.5,7.5) P11(-10.5,7.5) P12(-9.5,7.5) P13(-8.5,7.5) P14(-7.5,7.5) P15(-6.5,7.5) P16(-5.5,7.5) P17(-4.5,7.5) P18(-3.5,7.5) P19(-2.5,7.5) P20(-1.5,7.5) P21(-0.5,7.5) P22(0.5,7.5) P23(1.5,7.5) P24(2.5,7.5) P25(3.5,7.5) P26(4.5,7.5) P27(5.5,7.5) P28(6.5,7.5) P29(7.5,7.5) P30(8.5,7.5) P31(9.5,7.5) P32(10.5,7.5) P33(11.5,7.5) P34(12.5,7.5) P35(13.5,7.5) P36(14.5,7.5) P37(15.5,7.5) P38(16.5,7.5) P39(17.5,7.5) P40(18.5,7.5) P41(19.5,7.5) P42(20.5,7.5) R1(-20.5,6.5) R2(-19.5,6.5) R3(-18.5,6.5) R4(-17.5,6.5) R5(-16.5,6.5) R6(-15.5,6.5) R7(-14.5,6.5) R8(-13.5,6.5) R9(-12.5,6.5) R10(-11.5,6.5) R11(-10.5,6.5) R12(-9.5,6.5) R13(-8.5,6.5) R14(-7.5,6.5) R15(-6.5,6.5) R16(-5.5,6.5) R17(-4.5,6.5) R18(-3.5,6.5) R19(-2.5,6.5) R20(-1.5,6.5) R21(-0.5,6.5) R22(0.5,6.5) R23(1.5,6.5) R24(2.5,6.5) R25(3.5,6.5) R26(4.5,6.5) R27(5.5,6.5) R28(6.5,6.5) R29(7.5,6.5) R30(8.5,6.5) R31(9.5,6.5) R32(10.5,6.5) R33(11.5,6.5) R34(12.5,6.5) R35(13.5,6.5) R36(14.5,6.5) R37(15.5,6.5) R38(16.5,6.5) R39(17.5,6.5) R40(18.5,6.5) R41(19.5,6.5) R42(20.5,6.5) T1(-20.5,5.5) T2(-19.5,5.5) T3(-18.5,5.5) T4(-17.5,5.5) T5(-16.5,5.5) T6(-15.5,5.5) T7(-14.5,5.5) T8(-13.5,5.5) T9(-12.5,5.5) T10(-11.5,5.5) T11(-10.5,5.5) T12(-9.5,5.5) T13(-8.5,5.5) T14(-7.5,5.5) T15(-6.5,5.5) T16(-5.5,5.5) T17(-4.5,5.5) T18(-3.5,5.5) T19(-2.5,5.5) T20(-1.5,5.5) T21(-0.5,5.5) T22(0.5,5.5) T23(1.5,5.5) T24(2.5,5.5) T25(3.5,5.5) T26(4.5,5.5) T27(5.5,5.5) T28(6.5,5.5) T29(7.5,5.5) T30(8.5,5.5) T31(9.5,5.5) T32(10.5,5.5) T33(11.5,5.5) T34(12.5,5.5) T35(13.5,5.5) T36(14.5,5.5) T37(15.5,5.5) T38(16.5,5.5) T39(17.5,5.5) T40(18.5,5.5) T41(19.5,5.5) T42(20.5,5.5) U1(-20.5,4.5) U2(-19.5,4.5) U3(-18.5,4.5) U4(-17.5,4.5) U5(-16.5,4.5) U6(-15.5,4.5) U7(-14.5,4.5) U8(-13.5,4.5) U9(-12.5,4.5) U10(-11.5,4.5) U11(-10.5,4.5) U12(-9.5,4.5) U13(-8.5,4.5) U14(-7.5,4.5) U15(-6.5,4.5) U16(-5.5,4.5) U17(-4.5,4.5) U18(-3.5,4.5) U19(-2.5,4.5) U20(-1.5,4.5) U21(-0.5,4.5) U22(0.5,4.5) U23(1.5,4.5) U24(2.5,4.5) U25(3.5,4.5) U26(4.5,4.5) U27(5.5,4.5) U28(6.5,4.5) U29(7.5,4.5) U30(8.5,4.5) U31(9.5,4.5) U32(10.5,4.5) U33(11.5,4.5) U34(12.5,4.5) U35(13.5,4.5) U36(14.5,4.5) U37(15.5,4.5) U38(16.5,4.5) U39(17.5,4.5) U40(18.5,4.5) U41(19.5,4.5) U42(20.5,4.5) V1(-20.5,3.5) V2(-19.5,3.5) V3(-18.5,3.5) V4(-17.5,3.5) V5(-16.5,3.5) V6(-15.5,3.5) V7(-14.5,3.5) V8(-13.5,3.5) V9(-12.5,3.5) V10(-11.5,3.5) V11(-10.5,3.5) V12(-9.5,3.5) V13(-8.5,3.5) V14(-7.5,3.5) V15(-6.5,3.5) V16(-5.5,3.5) V17(-4.5,3.5) V18(-3.5,3.5) V19(-2.5,3.5) V20(-1.5,3.5) V21(-0.5,3.5) V22(0.5,3.5) V23(1.5,3.5) V24(2.5,3.5) V25(3.5,3.5) V26(4.5,3.5) V27(5.5,3.5) V28(6.5,3.5) V29(7.5,3.5) V30(8.5,3.5) V31(9.5,3.5) V32(10.5,3.5) V33(11.5,3.5) V34(12.5,3.5) V35(13.5,3.5) V36(14.5,3.5) V37(15.5,3.5) V38(16.5,3.5) V39(17.5,3.5) V40(18.5,3.5) V41(19.5,3.5) V42(20.5,3.5) W1(-20.5,2.5) W2(-19.5,2.5) W3(-18.5,2.5) W4(-17.5,2.5) W5(-16.5,2.5) W6(-15.5,2.5) W7(-14.5,2.5) W8(-13.5,2.5) W9(-12.5,2.5) W10(-11.5,2.5) W11(-10.5,2.5) W12(-9.5,2.5) W13(-8.5,2.5) W14(-7.5,2.5) W15(-6.5,2.5) W16(-5.5,2.5) W17(-4.5,2.5) W18(-3.5,2.5) W19(-2.5,2.5) W20(-1.5,2.5) W21(-0.5,2.5) W22(0.5,2.5) W23(1.5,2.5) W24(2.5,2.5) W25(3.5,2.5) W26(4.5,2.5) W27(5.5,2.5) W28(6.5,2.5) W29(7.5,2.5) W30(8.5,2.5) W31(9.5,2.5) W32(10.5,2.5) W33(11.5,2.5) W34(12.5,2.5) W35(13.5,2.5) W36(14.5,2.5) W37(15.5,2.5) W38(16.5,2.5) W39(17.5,2.5) W40(18.5,2.5) W41(19.5,2.5) W42(20.5,2.5) Y1(-20.5,1.5) Y2(-19.5,1.5) Y3(-18.5,1.5) Y4(-17.5,1.5) Y5(-16.5,1.5) Y6(-15.5,1.5) Y7(-14.5,1.5) Y8(-13.5,1.5) Y9(-12.5,1.5) Y10(-11.5,1.5) Y11(-10.5,1.5) Y12(-9.5,1.5) Y13(-8.5,1.5) Y14(-7.5,1.5) Y15(-6.5,1.5) Y16(-5.5,1.5) Y17(-4.5,1.5) Y18(-3.5,1.5) Y19(-2.5,1.5) Y20(-1.5,1.5) Y21(-0.5,1.5) Y22(0.5,1.5) Y23(1.5,1.5) Y24(2.5,1.5) Y25(3.5,1.5) Y26(4.5,1.5) Y27(5.5,1.5) Y28(6.5,1.5) Y29(7.5,1.5) Y30(8.5,1.5) Y31(9.5,1.5) Y32(10.5,1.5) Y33(11.5,1.5) Y34(12.5,1.5) Y35(13.5,1.5) Y36(14.5,1.5) Y37(15.5,1.5) Y38(16.5,1.5) Y39(17.5,1.5) Y40(18.5,1.5) Y41(19.5,1.5) Y42(20.5,1.5)
  silkscreen extent -21.25,-21.25 21.25,21.25, body extent -21.25,-21.25 21.25,21.25, height 3.5

## Part data
U1 U2: library part IC-MEM-1, "72Mb, 36-Bit wide, QDR2+ Synchronous SRAM with ODT"
U4: library part IC-MEM-2, "2Gb, x16, BGA84 DDR2 SDRAM IC"
U5: library part IC-PLD-0, "Virtex-6 475SXT 1760-pin FPGA"

## Via types
v1: diameter 19.4, hole 10, L1 TOP to L10 BOT, 2087 vias
v2: diameter 18.6, hole 10, L1 TOP to L10 BOT, tented both sides, 78 vias

## Nets (pads, with @x,y where several pads share a name; then routed paths per layer and width w, separated by ;. In a path a pad name is that pad's centre, name@x,y a point inside that pad or via, vN(x,y) a via of type N, cw(c..) or ccw(c..) an arc to the next point about the centre after c; other vN are vias at no path point)
1V0: U5.AA12 U5.AA14 U5.AA16 U5.AA18 U5.AA20 U5.AA24 U5.AA26 U5.AB13 U5.AB15 U5.AB17 U5.AB19 U5.AB23 U5.AB25 U5.AB27 U5.AC12 U5.AC14 U5.AC16 U5.AC18 U5.AC20 U5.AC24 U5.AC26 U5.AD13 U5.AD15 U5.AD17 U5.AD19 U5.AD21 U5.AD23 U5.AD25 U5.AD27 U5.AE12 U5.AE14 U5.AE16 U5.AE18 U5.AE20 U5.AE22 U5.AE24 U5.AE26 U5.AF13 U5.AF15 U5.AF17 U5.AF19 U5.AF21 U5.AF23 U5.AF25 U5.AG12 U5.AG14 U5.AG16 U5.AG18 U5.AG20 U5.AG22 U5.AG24 U5.AG26 U5.AH13 U5.AH15 U5.AH19 U5.AH21 U5.AH23 U5.P13 U5.P15 U5.R12 U5.R14 U5.R18 U5.R20 U5.R22 U5.R24 U5.T13 U5.T15 U5.T17 U5.T19 U5.T21 U5.T23 U5.T25 U5.T27 U5.U12 U5.U14 U5.U16 U5.U18 U5.U20 U5.U22 U5.U24 U5.U26 U5.V13 U5.V15 U5.V17 U5.V19 U5.V21 U5.V23 U5.V25 U5.V27 U5.W12 U5.W14 U5.W16 U5.W18 U5.W20 U5.W22 U5.W24 U5.W26 U5.Y13 U5.Y15 U5.Y17 U5.Y19 U5.Y23 U5.Y25 U5.Y27 | length 2895.4
  L1 TOP w5: v1(2177.28,765.04) U5.P13@2196.97,784.72 ; v1(2177.28,843.78) U5.P15@2196.97,863.46 ; v1(2216.65,725.67) U5.R12@2236.34,745.35 ; v1(2216.65,804.41) U5.R14@2236.34,824.09 ; v1(2216.65,961.89) U5.R18@2236.34,981.57 ; v1(2216.65,1040.63) U5.R20@2236.34,1060.32 ; v1(2216.65,1158.74) U5.R22@2236.34,1139.06 ; v1(2216.65,1237.48) U5.R24@2236.34,1217.8 ; v1(2256.02,765.04) U5.T13@2275.71,784.72 ; v1(2256.02,843.78) U5.T15@2275.71,863.46 ; v1(2256.02,922.52) U5.T17@2275.71,942.2 ; v1(2256.02,1001.26) U5.T19@2275.71,1020.94 ; v1(2256.02,1080) U5.T21@2275.71,1099.69 ; v1(2256.02,1198.11) U5.T23@2275.71,1178.43 ; v1(2256.02,1276.85) U5.T25@2275.71,1257.17 ; v1(2256.02,1355.59) U5.T27@2275.71,1335.91 ; v1(2295.39,725.67) U5.U12@2315.08,745.35 ; v1(2295.39,804.41) U5.U14@2315.08,824.09 ; v1(2295.39,883.15) U5.U16@2315.08,902.83 ; v1(2295.39,961.89) U5.U18@2315.08,981.57 ; v1(2295.39,1040.63) U5.U20@2315.08,1060.32 ; v1(2295.39,1158.74) U5.U22@2315.08,1139.06 ; v1(2295.39,1237.48) U5.U24@2315.08,1217.8 ; v1(2295.39,1316.22) U5.U26@2315.08,1296.54 ; v1(2334.76,765.04) U5.V13@2354.45,784.72 ; v1(2334.76,843.78) U5.V15@2354.45,863.46 ; v1(2334.76,922.52) U5.V17@2354.45,942.2 ; v1(2334.76,1001.26) U5.V19@2354.45,1020.94 ; v1(2334.76,1080) U5.V21@2354.45,1099.69 ; v1(2334.76,1198.11) U5.V23@2354.45,1178.43 ; v1(2334.76,1276.85) U5.V25@2354.45,1257.17 ; v1(2334.76,1355.59) U5.V27@2354.45,1335.91 ; v1(2374.13,725.67) U5.W12@2393.82,745.35 ; v1(2374.13,804.41) U5.W14@2393.82,824.09 ; v1(2374.13,883.15) U5.W16@2393.82,902.83 ; v1(2374.13,961.89) U5.W18@2393.82,981.57 ; v1(2374.13,1040.63) U5.W20@2393.82,1060.32 ; v1(2374.13,1158.74) U5.W22@2393.82,1139.06 ; v1(2374.13,1237.48) U5.W24@2393.82,1217.8 ; v1(2374.13,1316.22) U5.W26@2393.82,1296.54 ; v1(2413.5,765.04) U5.Y13@2433.19,784.72 ; v1(2413.5,843.78) U5.Y15@2433.19,863.46 ; v1(2413.5,922.52) U5.Y17@2433.19,942.2 ; v1(2413.5,1001.26) U5.Y19@2433.19,1020.94 ; v1(2413.5,1198.11) U5.Y23@2433.19,1178.43 ; v1(2413.5,1276.85) U5.Y25@2433.19,1257.17 ; v1(2413.5,1355.59) U5.Y27@2433.19,1335.91 ; v1(2452.87,725.67) U5.AA12@2472.56,745.35 ; v1(2452.87,804.41) U5.AA14@2472.56,824.09 ; v1(2452.87,883.15) U5.AA16@2472.56,902.83 ; v1(2452.87,961.89) U5.AA18@2472.56,981.57 ; v1(2452.87,1040.63) U5.AA20@2472.56,1060.32 ; v1(2452.87,1237.48) U5.AA24@2472.56,1217.8 ; v1(2452.87,1316.22) U5.AA26@2472.56,1296.54 ; U5.AB13@2511.93,784.72 v1(2531.62,765.04) ; U5.AB15@2511.93,863.46 v1(2531.62,843.78) ; U5.AB17@2511.93,942.2 v1(2531.62,922.52) ; U5.AB19@2511.93,1020.94 v1(2531.62,1001.26) ; U5.AB23@2511.93,1178.43 v1(2531.62,1198.11) ; U5.AB25@2511.93,1257.17 v1(2531.62,1276.85) ; U5.AB27@2511.93,1335.91 v1(2531.62,1355.59) ; U5.AC12@2551.3,745.35 v1(2570.99,725.67) ; U5.AC14@2551.3,824.09 v1(2570.99,804.41) ; U5.AC16@2551.3,902.83 v1(2570.99,883.15) ; U5.AC18@2551.3,981.57 v1(2570.99,961.89) ; U5.AC20@2551.3,1060.32 v1(2570.99,1040.63) ; U5.AC24@2551.3,1217.8 v1(2570.99,1237.48) ; U5.AC26@2551.3,1296.54 v1(2570.99,1316.22) ; U5.AD13@2590.67,784.72 v1(2610.36,765.04) ; U5.AD15@2590.67,863.46 v1(2610.36,843.78) ; U5.AD17@2590.67,942.2 v1(2610.36,922.52) ; U5.AD19@2590.67,1020.94 v1(2610.36,1001.26) ; U5.AD21@2590.67,1099.69 v1(2610.36,1080) ; U5.AD23@2590.67,1178.43 v1(2610.36,1198.11) ; U5.AD25@2590.67,1257.17 v1(2610.36,1276.85) ; U5.AD27@2590.67,1335.91 v1(2610.36,1355.59) ; U5.AE12@2630.04,745.35 v1(2649.73,725.67) ; U5.AE14@2630.04,824.09 v1(2649.73,804.41) ; U5.AE16@2630.04,902.83 v1(2649.73,883.15) ; U5.AE18@2630.04,981.57 v1(2649.73,961.89) ; U5.AE20@2630.04,1060.32 v1(2649.73,1040.63) ; U5.AE22@2630.04,1139.06 v1(2649.73,1158.74) ; U5.AE24@2630.04,1217.8 v1(2649.73,1237.48) ; U5.AE26@2630.04,1296.54 v1(2649.73,1316.22) ; U5.AF13@2669.41,784.72 v1(2689.1,765.04) ; U5.AF15@2669.41,863.46 v1(2689.1,843.78) ; U5.AF17@2669.41,942.2 v1(2689.1,922.52) ; U5.AF19@2669.41,1020.94 v1(2689.1,1001.26) ; U5.AF21@2669.41,1099.69 v1(2689.1,1080) ; U5.AF23@2669.41,1178.43 v1(2689.1,1198.11) ; U5.AF25@2669.41,1257.17 v1(2689.1,1276.85) ; U5.AG12@2708.78,745.35 v1(2728.47,725.67) ; U5.AG14@2708.78,824.09 v1(2728.47,804.41) ; U5.AG16@2708.78,902.83 v1(2728.47,883.15) ; U5.AG18@2708.78,981.57 v1(2728.47,961.89) ; U5.AG20@2708.78,1060.32 v1(2728.47,1040.63) ; U5.AG22@2708.78,1139.06 v1(2728.47,1158.74) ; U5.AG24@2708.78,1217.8 v1(2728.47,1237.48) ; U5.AG26@2708.78,1296.54 v1(2728.47,1316.22) ; U5.AH13@2748.15,784.72 v1(2767.84,765.04) ; U5.AH15@2748.15,863.46 v1(2767.84,843.78) ; U5.AH19@2748.15,1020.94 v1(2767.84,1001.26) ; U5.AH21@2748.15,1099.69 v1(2767.84,1080) ; U5.AH23@2748.15,1178.43 v1(2767.84,1198.11)
1V0MON: 
1V5: U1.E4 U1.E8 U1.F4 U1.F8 U1.G4 U1.G8 U1.H3 U1.H4 U1.H8 U1.H9 U1.J4 U1.J8 U1.K4 U1.K8 U1.L4 U1.L8 U2.E4 U2.E8 U2.F4 U2.F8 U2.G4 U2.G8 U2.H3 U2.H4 U2.H8 U2.H9 U2.J4 U2.J8 U2.K4 U2.K8 U2.L4 U2.L8 U5.A23 U5.A33 U5.AA33 U5.AB40 U5.AC37 U5.AD34 U5.AE41 U5.AF38 U5.AG25 U5.AG35 U5.AH22 U5.AH42 U5.AJ19 U5.AJ39 U5.AK16 U5.AK26 U5.AK36 U5.AL13 U5.AL23 U5.AL33 U5.AM20 U5.AM30 U5.AM40 U5.AN17 U5.AN27 U5.AN37 U5.AP24 U5.AP34 U5.AR21 U5.AR31 U5.AR41 U5.AT18 U5.AT28 U5.AT38 U5.AU25 U5.AU35 U5.AV22 U5.AV32 U5.AV42 U5.AW19 U5.AW29 U5.AW39 U5.AY26 U5.AY36 U5.B30 U5.BA23 U5.BA33 U5.BB20 U5.BB30 U5.BB40 U5.C17 U5.D14 U5.D24 U5.F18 U5.G15 U5.H12 U5.H22 U5.J19 U5.K16 U5.K26 U5.L13 U5.L23 U5.M20 U5.N17 U5.N27 U5.P14 U5.P24 U5.R21 | length 2784
  L1 TOP w5: v1(422.32,1469.64) U1.H9@442.01,1489.33 ; v1(427.6,607.12) U2.H9@447.28,626.81 ; v1(461.69,1351.53) U1.E8@481.38,1371.22 ; v1(461.69,1390.9) U1.F8@481.38,1410.59 ; v1(461.69,1430.27) U1.G8@481.38,1449.96 ; v1(461.69,1469.64) U1.H8@481.38,1489.33 ; v1(461.69,1548.39) U1.J8@481.38,1528.7 ; v1(461.69,1587.76) U1.K8@481.38,1568.07 ; v1(461.69,1627.13) U1.L8@481.38,1607.44 ; v1(466.97,489.01) U2.E8@486.65,508.7 ; v1(466.97,528.38) U2.F8@486.65,548.07 ; v1(466.97,567.75) U2.G8@486.65,587.44 ; v1(466.97,607.12) U2.H8@486.65,626.81 ; v1(466.97,685.87) U2.J8@486.65,666.18 ; v1(466.97,725.24) U2.K8@486.65,705.55 ; v1(466.97,764.61) U2.L8@486.65,744.92 ; U1.E4@638.86,1371.22 v1(658.54,1351.53) ; U1.F4@638.86,1410.59 v1(658.54,1390.9) ; U1.G4@638.86,1449.96 v1(658.54,1430.27) ; U1.H4@638.86,1489.33 v1(658.54,1469.64) ; U1.J4@638.86,1528.7 v1(658.54,1548.39) ; U1.K4@638.86,1568.07 v1(658.54,1587.76) ; U1.L4@638.86,1607.44 v1(658.54,1627.13) ; U2.E4@644.14,508.7 v1(663.82,489.01) ; U2.F4@644.14,548.07 v1(663.82,528.38) ; U2.G4@644.14,587.44 v1(663.82,567.75) ; U2.H4@644.14,626.81 v1(663.82,607.12) ; U2.J4@644.14,666.18 v1(663.82,685.87) ; U2.K4@644.14,705.55 v1(663.82,725.24) ; U2.L4@644.14,744.92 v1(663.82,764.61) ; U1.H3@678.23,1489.33 v1(697.91,1469.64) ; U2.H3@683.51,626.81 v1(703.19,607.12) ; v1(1665.47,1198.11) U5.A23@1685.16,1178.43 ; v1(1665.47,1591.81) U5.A33@1685.16,1572.13 ; v1(1704.84,1473.7) U5.B30@1724.53,1454.02 ; v1(1744.21,922.52) U5.C17@1763.9,942.2 ; v1(1783.58,804.41) U5.D14@1803.27,824.09 ; v1(1783.58,1237.48) U5.D24@1803.27,1217.8 ; v1(1862.32,961.89) U5.F18@1882.01,981.57 ; v1(1901.69,843.78) U5.G15@1921.38,863.46 ; v1(1941.06,725.67) U5.H12@1960.75,745.35 ; v1(1941.06,1158.74) U5.H22@1960.75,1139.06 ; v1(1980.43,1001.26) U5.J19@2000.12,1020.94 ; v1(2019.8,883.15) U5.K16@2039.49,902.83 ; v1(2019.8,1316.22) U5.K26@2039.49,1296.54 ; v1(2059.17,765.04) U5.L13@2078.86,784.72 ; v1(2059.17,1198.11) U5.L23@2078.86,1178.43 ; v1(2098.54,1040.63) U5.M20@2118.23,1060.32 ; v1(2137.91,922.52) U5.N17@2157.6,942.2 ; v1(2137.91,1355.59) U5.N27@2157.6,1335.91 ; v1(2177.28,804.41) U5.P14@2196.97,824.09 ; v1(2177.28,1237.48) U5.P24@2196.97,1217.8 ; v1(2216.65,1080) U5.R21@2236.34,1099.69 ; v1(2452.87,1591.81) U5.AA33@2472.56,1572.13 ; U5.AB40@2511.93,1847.72 v1(2531.62,1867.4) ; U5.AC37@2551.3,1729.61 v1(2570.99,1749.29) ; U5.AD34@2590.67,1611.5 v1(2610.36,1631.18) ; U5.AE41@2630.04,1887.09 v1(2649.73,1906.77) ; U5.AF38@2669.41,1768.98 v1(2689.1,1788.66) ; U5.AG25@2708.78,1257.17 v1(2728.47,1276.85) ; U5.AG35@2708.78,1650.87 v1(2728.47,1670.55) ; U5.AH22@2748.15,1139.06 v1(2767.84,1158.74) ; U5.AH42@2748.15,1926.46 v1(2767.84,1946.14) ; U5.AJ19@2787.52,1020.94 v1(2807.21,1001.26) ; U5.AJ39@2787.52,1808.35 v1(2807.21,1828.03) ; U5.AK16@2826.89,902.83 v1(2846.58,883.15) ; U5.AK26@2826.89,1296.54 v1(2846.58,1316.22) ; U5.AK36@2826.89,1690.24 v1(2846.58,1709.92) ; U5.AL13@2866.26,784.72 v1(2885.95,765.04) ; U5.AL23@2866.26,1178.43 v1(2885.95,1198.11) ; U5.AL33@2866.26,1572.13 v1(2885.95,1591.81) ; U5.AM20@2905.63,1060.32 v1(2925.32,1040.63) ; U5.AM30@2905.63,1454.02 v1(2925.32,1473.7) ; U5.AM40@2905.63,1847.72 v1(2925.32,1867.4) ; U5.AN17@2945,942.2 v1(2964.69,922.52) ; U5.AN27@2945,1335.91 v1(2964.69,1355.59) ; U5.AN37@2945,1729.61 v1(2964.69,1749.29) ; U5.AP24@2984.37,1217.8 v1(3004.06,1237.48) ; U5.AP34@2984.37,1611.5 v1(3004.06,1631.18) ; U5.AR21@3023.74,1099.69 v1(3043.43,1080) ; U5.AR31@3023.74,1493.39 v1(3043.43,1513.07) ; U5.AR41@3023.74,1887.09 v1(3043.43,1906.77) ; U5.AT18@3063.11,981.57 v1(3082.8,961.89) ; U5.AT28@3063.11,1375.28 v1(3082.8,1394.96) ; U5.AT38@3063.11,1768.98 v1(3082.8,1788.66) ; U5.AU25@3102.48,1257.17 v1(3122.17,1276.85) ; U5.AU35@3102.48,1650.87 v1(3122.17,1670.55) ; U5.AV22@3141.85,1139.06 v1(3161.54,1158.74) ; U5.AV32@3141.85,1532.76 v1(3161.54,1552.44) ; U5.AV42@3141.85,1926.46 v1(3161.54,1946.14) ; U5.AW19@3181.22,1020.94 v1(3200.91,1001.26) ; U5.AW29@3181.22,1414.65 v1(3200.91,1434.33) ; U5.AW39@3181.22,1808.35 v1(3200.91,1828.03) ; U5.AY26@3220.59,1296.54 v1(3240.28,1316.22) ; U5.AY36@3220.59,1690.24 v1(3240.28,1709.92) ; U5.BA23@3259.96,1178.43 v1(3279.65,1198.11) ; U5.BA33@3259.96,1572.13 v1(3279.65,1591.81) ; U5.BB20@3299.33,1060.32 v1(3319.02,1040.63) ; U5.BB30@3299.33,1454.02 v1(3319.02,1473.7) ; U5.BB40@3299.33,1847.72 v1(3319.02,1867.4)
1V5_PPC: 
1V5MON: 
1V8: U1.F5 U1.F7 U1.G5 U1.G7 U1.H5 U1.H7 U1.J5 U1.J7 U1.K5 U1.K7 U2.F5 U2.F7 U2.G5 U2.G7 U2.H5 U2.H7 U2.J5 U2.J7 U2.K5 U2.K7 | length 556.8
  L1 TOP w5: v1(501.06,1390.9) U1.F7@520.75,1410.59 ; v1(501.06,1430.27) U1.G7@520.75,1449.96 ; v1(501.06,1469.64) U1.H7@520.75,1489.33 ; v1(501.06,1548.39) U1.J7@520.75,1528.7 ; v1(501.06,1587.76) U1.K7@520.75,1568.07 ; v1(506.34,528.38) U2.F7@526.02,548.07 ; v1(506.34,567.75) U2.G7@526.02,587.44 ; v1(506.34,607.12) U2.H7@526.02,626.81 ; v1(506.34,685.87) U2.J7@526.02,666.18 ; v1(506.34,725.24) U2.K7@526.02,705.55 ; U1.F5@599.49,1410.59 v1(619.17,1390.9) ; U1.G5@599.49,1449.96 v1(619.17,1430.27) ; U1.H5@599.49,1489.33 v1(619.17,1469.64) ; U1.J5@599.49,1528.7 v1(619.17,1548.39) ; U1.K5@599.49,1568.07 v1(619.17,1587.76) ; U2.F5@604.76,548.07 v1(624.45,528.38) ; U2.G5@604.76,587.44 v1(624.45,567.75) ; U2.H5@604.76,626.81 v1(624.45,607.12) ; U2.J5@604.76,666.18 v1(624.45,685.87) ; U2.K5@604.76,705.55 v1(624.45,725.24)
1V8_FTDI: 
1V8_PPC: 
1V8MON: 
2V5: U5.AA10 U5.AA28 U5.AB11 U5.AB29 U5.AB30 U5.AC10 U5.AC28 U5.AD11 U5.AD29 U5.AE10 U5.AE28 U5.AE31 U5.AF27 U5.AF29 U5.AH32 U5.AJ29 U5.AP14 U5.AR11 U5.AU15 U5.AV12 U5.AY16 U5.B40 U5.BA13 U5.C37 U5.E41 U5.H42 U5.J39 U5.L33 U5.M10 U5.M30 U5.M40 U5.N37 U5.P34 U5.R10 U5.R11 U5.R31 U5.R41 U5.T28 U5.T29 U5.T38 U5.U28 U5.U35 U5.V11 U5.V29 U5.V32 U5.V42 U5.W10 U5.W28 U5.W29 U5.W39 U5.Y11 U5.Y22 U5.Y29 U5.Y36 | length 1503.4
  L1 TOP w5: v1(1704.84,1867.4) U5.B40@1724.53,1847.72 ; v1(1744.21,1749.29) U5.C37@1763.9,1729.61 ; v1(1822.95,1906.77) U5.E41@1842.64,1887.09 ; v1(1941.06,1946.14) U5.H42@1960.75,1926.46 ; v1(1980.43,1828.03) U5.J39@2000.12,1808.35 ; v1(2059.17,1591.81) U5.L33@2078.86,1572.13 ; v1(2098.54,646.93) U5.M10@2118.23,666.61 ; v1(2098.54,1473.7) U5.M30@2118.23,1454.02 ; v1(2098.54,1867.4) U5.M40@2118.23,1847.72 ; v1(2137.91,1749.29) U5.N37@2157.6,1729.61 ; v1(2177.28,1631.18) U5.P34@2196.97,1611.5 ; v1(2216.65,646.93) U5.R10@2236.34,666.61 ; v1(2216.65,686.3) U5.R11@2236.34,705.98 ; v1(2216.65,1513.07) U5.R31@2236.34,1493.39 ; v1(2216.65,1906.77) U5.R41@2236.34,1887.09 ; v1(2256.02,1394.96) U5.T28@2275.71,1375.28 ; v1(2256.02,1434.33) U5.T29@2275.71,1414.65 ; v1(2256.02,1788.66) U5.T38@2275.71,1768.98 ; v1(2295.39,1394.96) U5.U28@2315.08,1375.28 ; v1(2295.39,1670.55) U5.U35@2315.08,1650.87 ; v1(2334.76,686.3) U5.V11@2354.45,705.98 ; v1(2334.76,1434.33) U5.V29@2354.45,1414.65 ; v1(2334.76,1552.44) U5.V32@2354.45,1532.76 ; v1(2334.76,1946.14) U5.V42@2354.45,1926.46 ; v1(2374.13,646.93) U5.W10@2393.82,666.61 ; v1(2374.13,1394.96) U5.W28@2393.82,1375.28 ; v1(2374.13,1434.33) U5.W29@2393.82,1414.65 ; v1(2374.13,1828.03) U5.W39@2393.82,1808.35 ; v1(2413.5,686.3) U5.Y11@2433.19,705.98 ; v1(2413.5,1158.74) U5.Y22@2433.19,1139.06 ; v1(2413.5,1434.33) U5.Y29@2433.19,1414.65 ; v1(2413.5,1709.92) U5.Y36@2433.19,1690.24 ; v1(2452.87,646.93) U5.AA10@2472.56,666.61 ; v1(2452.87,1394.96) U5.AA28@2472.56,1375.28 ; U5.AB11@2511.93,705.98 v1(2531.62,686.3) ; U5.AB29@2511.93,1414.65 v1(2531.62,1434.33) ; U5.AB30@2511.93,1454.02 v1(2531.62,1473.7) ; U5.AC10@2551.3,666.61 v1(2570.99,646.93) ; U5.AC28@2551.3,1375.28 v1(2570.99,1394.96) ; U5.AD11@2590.67,705.98 v1(2610.36,686.3) ; U5.AD29@2590.67,1414.65 v1(2610.36,1434.33) ; U5.AE10@2630.04,666.61 v1(2649.73,646.93) ; U5.AE28@2630.04,1375.28 v1(2649.73,1394.96) ; U5.AE31@2630.04,1493.39 v1(2649.73,1513.07) ; U5.AF27@2669.41,1335.91 v1(2689.1,1355.59) ; U5.AF29@2669.41,1414.65 v1(2689.1,1434.33) ; U5.AH32@2748.15,1532.76 v1(2767.84,1552.44) ; U5.AJ29@2787.52,1414.65 v1(2807.21,1434.33) ; U5.AP14@2984.37,824.09 v1(3004.06,804.41) ; U5.AR11@3023.74,705.98 v1(3043.43,686.3) ; U5.AU15@3102.48,863.46 v1(3122.17,843.78) ; U5.AV12@3141.85,745.35 v1(3161.54,725.67) ; U5.AY16@3220.59,902.83 v1(3240.28,883.15) ; U5.BA13@3259.96,784.72 v1(3279.65,765.04)
2V5_PPC: 
2V5MON: 
3V3: 
3V3_PPC: 
3V3AUX: 
3V3MON: 
3V8AUX: 
5V: 
5VAUX: 
5VMON: 
12V: 
12VMON: 
ATX_PG: 
ATX_PGN: 
ATX_PWR_OK: 
AUX3V3_PG: 
AUX_CLK_N: U5.AW16 | length 27.8
  L1 TOP w3.8: U5.AW16@3181.22,902.83 v1(3200.91,883.15)
AUX_CLK_P: U5.AV16 | length 27.8
  L1 TOP w3.8: U5.AV16@3141.85,902.83 v1(3161.54,883.15)
AUX_SCL: 
AUX_SDA: 
AUX_SYNCI_N: U5.BB17 | length 27.8
  L1 TOP w3.8: U5.BB17@3299.33,942.2 v1(3319.02,922.52)
AUX_SYNCI_P: U5.BB16 | length 27.8
  L1 TOP w3.8: U5.BB16@3299.33,902.83 v1(3319.02,883.15)
AUX_SYNCO_N: U5.BA17 | length 27.8
  L1 TOP w3.8: U5.BA17@3259.96,942.2 v1(3279.65,922.52)
AUX_SYNCO_P: U5.BA16 | length 27.8
  L1 TOP w3.8: U5.BA16@3259.96,902.83 v1(3279.65,883.15)
BOOT_CFG0: 
BOOT_CFG1: 
BOOT_CFG2: 
BOOT_CFG_DISN: 
CMON_1V0: 
CMON_1V5: 
CMON_1V8: 
CMON_2V5: 
CMON_3V3: 
CMON_FAULTN: 
CMON_TCK: 
CMON_TDI: 
CMON_TDO: 
CMON_TMS: 
CONFIG_DIP0: 
CONFIG_DIP1: 
CONFIG_DIP2: 
CONFIG_DIP3: 
CONFIG_DIP4: 
CONFIG_DIP5: 
CONFIG_DIP6: 
CONFIG_DIP7: 
CPLD_CLK: 
CPLD_IRQN: 
CPLD_LEDN: 
CPLD_PRDY: 
CPLD_TCK: 
CPLD_TDI: 
CPLD_TDO: 
CPLD_TMS: 
CPU_ERR: 
CPU_ERR_LEDN: 
CPU_RDY: 
CPU_RDY_LEDN: 
DDR2.A0: 
DDR2.A1: 
DDR2.A2: 
DDR2.A3: 
DDR2.A4: 
DDR2.A5: 
DDR2.A6: 
DDR2.A7: 
DDR2.A8: 
DDR2.A9: 
DDR2.A10: 
DDR2.A11: 
DDR2.A12: 
DDR2.A13: 
DDR2.BA0: 
DDR2.BA1: 
DDR2.BA2: 
DDR2.CASN: 
DDR2.CKE: 
DDR2.CLK_N0: 
DDR2.CLK_N1: 
DDR2.CLK_N2: 
DDR2.CLK_N3: 
DDR2.CLK_P0: 
DDR2.CLK_P1: 
DDR2.CLK_P2: 
DDR2.CLK_P3: 
DDR2.CLKOUT_N: 
DDR2.CLKOUT_P: 
DDR2.CLKOUTR_N: 
DDR2.CLKOUTR_P: 
DDR2.DM0: 
DDR2.DM1: 
DDR2.DM2: 
DDR2.DM3: 
DDR2.DM4: 
DDR2.DM5: 
DDR2.DM6: 
DDR2.DM7: 
DDR2.DQ0: 
DDR2.DQ1: 
DDR2.DQ2: 
DDR2.DQ3: 
DDR2.DQ4: 
DDR2.DQ5: 
DDR2.DQ6: 
DDR2.DQ7: 
DDR2.DQ8: 
DDR2.DQ9: 
DDR2.DQ10: 
DDR2.DQ11: 
DDR2.DQ12: 
DDR2.DQ13: 
DDR2.DQ14: 
DDR2.DQ15: 
DDR2.DQ16: 
DDR2.DQ17: 
DDR2.DQ18: 
DDR2.DQ19: 
DDR2.DQ20: 
DDR2.DQ21: 
DDR2.DQ22: 
DDR2.DQ23: 
DDR2.DQ24: 
DDR2.DQ25: 
DDR2.DQ26: 
DDR2.DQ27: 
DDR2.DQ28: 
DDR2.DQ29: 
DDR2.DQ30: 
DDR2.DQ31: 
DDR2.DQ32: 
DDR2.DQ33: 
DDR2.DQ34: 
DDR2.DQ35: 
DDR2.DQ36: 
DDR2.DQ37: 
DDR2.DQ38: 
DDR2.DQ39: 
DDR2.DQ40: 
DDR2.DQ41: 
DDR2.DQ42: 
DDR2.DQ43: 
DDR2.DQ44: 
DDR2.DQ45: 
DDR2.DQ46: 
DDR2.DQ47: 
DDR2.DQ48: 
DDR2.DQ49: 
DDR2.DQ50: 
DDR2.DQ51: 
DDR2.DQ52: 
DDR2.DQ53: 
DDR2.DQ54: 
DDR2.DQ55: 
DDR2.DQ56: 
DDR2.DQ57: 
DDR2.DQ58: 
DDR2.DQ59: 
DDR2.DQ60: 
DDR2.DQ61: 
DDR2.DQ62: 
DDR2.DQ63: 
DDR2.DQS0: 
DDR2.DQS1: 
DDR2.DQS2: 
DDR2.DQS3: 
DDR2.DQS4: 
DDR2.DQS5: 
DDR2.DQS6: 
DDR2.DQS7: 
DDR2.ODT: 
DDR2.RASN: 
DDR2.SN: 
DDR2.WEN: 
DDR2_VREF: 
DDR2_VTT: 
DDR3.A0: U5.BB38 | length 27.8
  L1 TOP w5: U5.BB38@3299.33,1768.98 v1(3319.02,1788.66)
DDR3.A1: U5.BB37 | length 27.8
  L1 TOP w5: U5.BB37@3299.33,1729.61 v1(3319.02,1749.29)
DDR3.A2: U5.BA37 | length 27.8
  L1 TOP w5: U5.BA37@3259.96,1729.61 v1(3279.65,1749.29)
DDR3.A3: U5.BA36 | length 27.8
  L1 TOP w5: U5.BA36@3259.96,1690.24 v1(3279.65,1709.92)
DDR3.A4: U5.BB36 | length 27.8
  L1 TOP w5: U5.BB36@3299.33,1690.24 v1(3319.02,1709.92)
DDR3.A5: U5.BA35 | length 27.8
  L1 TOP w5: U5.BA35@3259.96,1650.87 v1(3279.65,1670.55)
DDR3.A6: U5.AW36 | length 27.8
  L1 TOP w5: U5.AW36@3181.22,1690.24 v1(3200.91,1709.92)
DDR3.A7: U5.AY35 | length 27.8
  L1 TOP w5: U5.AY35@3220.59,1650.87 v1(3240.28,1670.55)
DDR3.A8: U5.BA34 | length 27.8
  L1 TOP w5: U5.BA34@3259.96,1611.5 v1(3279.65,1631.18)
DDR3.A9: U5.AW35 | length 27.8
  L1 TOP w5: U5.AW35@3181.22,1650.87 v1(3200.91,1670.55)
DDR3.A10: U5.BB39 | length 27.8
  L1 TOP w5: U5.BB39@3299.33,1808.35 v1(3319.02,1828.03)
DDR3.A11: U5.BB34 | length 27.8
  L1 TOP w5: U5.BB34@3299.33,1611.5 v1(3319.02,1631.18)
DDR3.A12: U5.AY34 | length 27.8
  L1 TOP w5: U5.AY34@3220.59,1611.5 v1(3240.28,1631.18)
DDR3.A13: U5.AT34 | length 27.8
  L1 TOP w5: U5.AT34@3063.11,1611.5 v1(3082.8,1631.18)
DDR3.A14: U5.BB33 | length 27.8
  L1 TOP w5: U5.BB33@3299.33,1572.13 v1(3319.02,1591.81)
DDR3.A15: U5.BB31 | length 27.8
  L1 TOP w5: U5.BB31@3299.33,1493.39 v1(3319.02,1513.07)
DDR3.BA0: U5.AW37 | length 27.8
  L1 TOP w5: U5.AW37@3181.22,1729.61 v1(3200.91,1749.29)
DDR3.BA1: U5.AY37 | length 27.8
  L1 TOP w5: U5.AY37@3220.59,1729.61 v1(3240.28,1749.29)
DDR3.BA2: U5.AY32 | length 27.8
  L1 TOP w5: U5.AY32@3220.59,1532.76 v1(3240.28,1552.44)
DDR3.CASN: U5.AU34 | length 27.8
  L1 TOP w5: U5.AU34@3102.48,1611.5 v1(3122.17,1631.18)
DDR3.CK_N: U5.AY33 | length 27.8
  L1 TOP w3.8: U5.AY33@3220.59,1572.13 v1(3240.28,1591.81)
DDR3.CK_P: U5.BA32 | length 27.8
  L1 TOP w3.8: U5.BA32@3259.96,1532.76 v1(3279.65,1552.44)